# Altium PCB JTAGconv.PcbDoc
Units mm, origin at the board's own origin, x right, y up, seen from the top; angles counter-clockwise.
Board outline 25.4 x 30.48 mm, 2 copper layers (Component Side, Bottom Layer), stack 0.325 mm thick; 22 components, 21 nets, 96 pads, 23 vias.
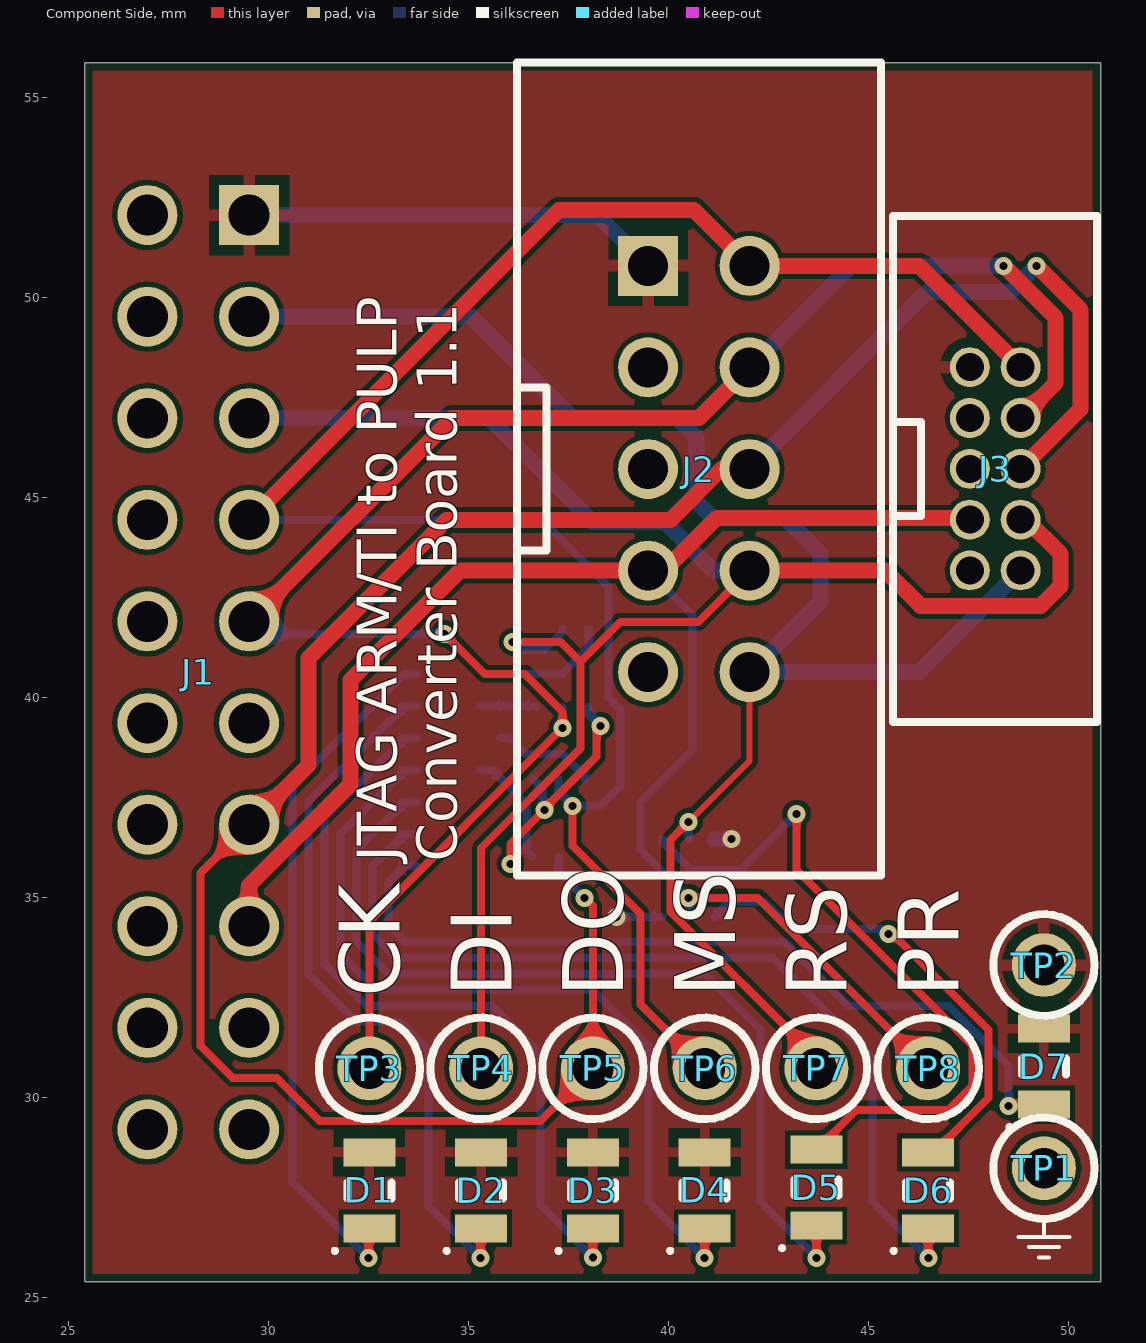
[diagram p0: Component Side view]
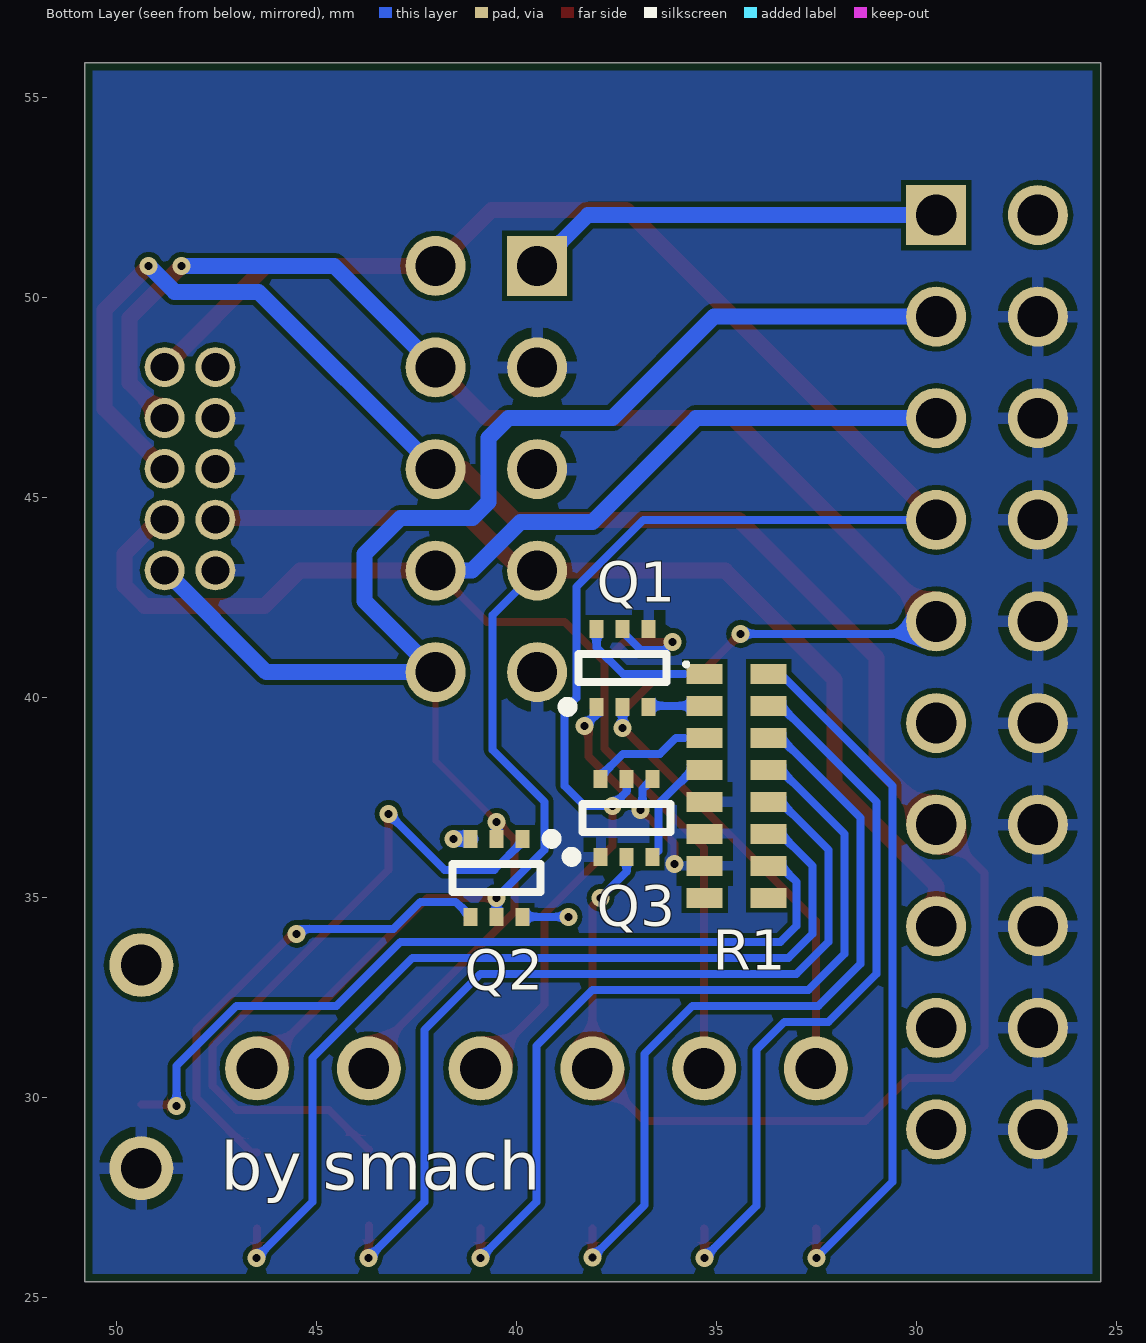
[diagram p1: Bottom Layer view, seen from below]
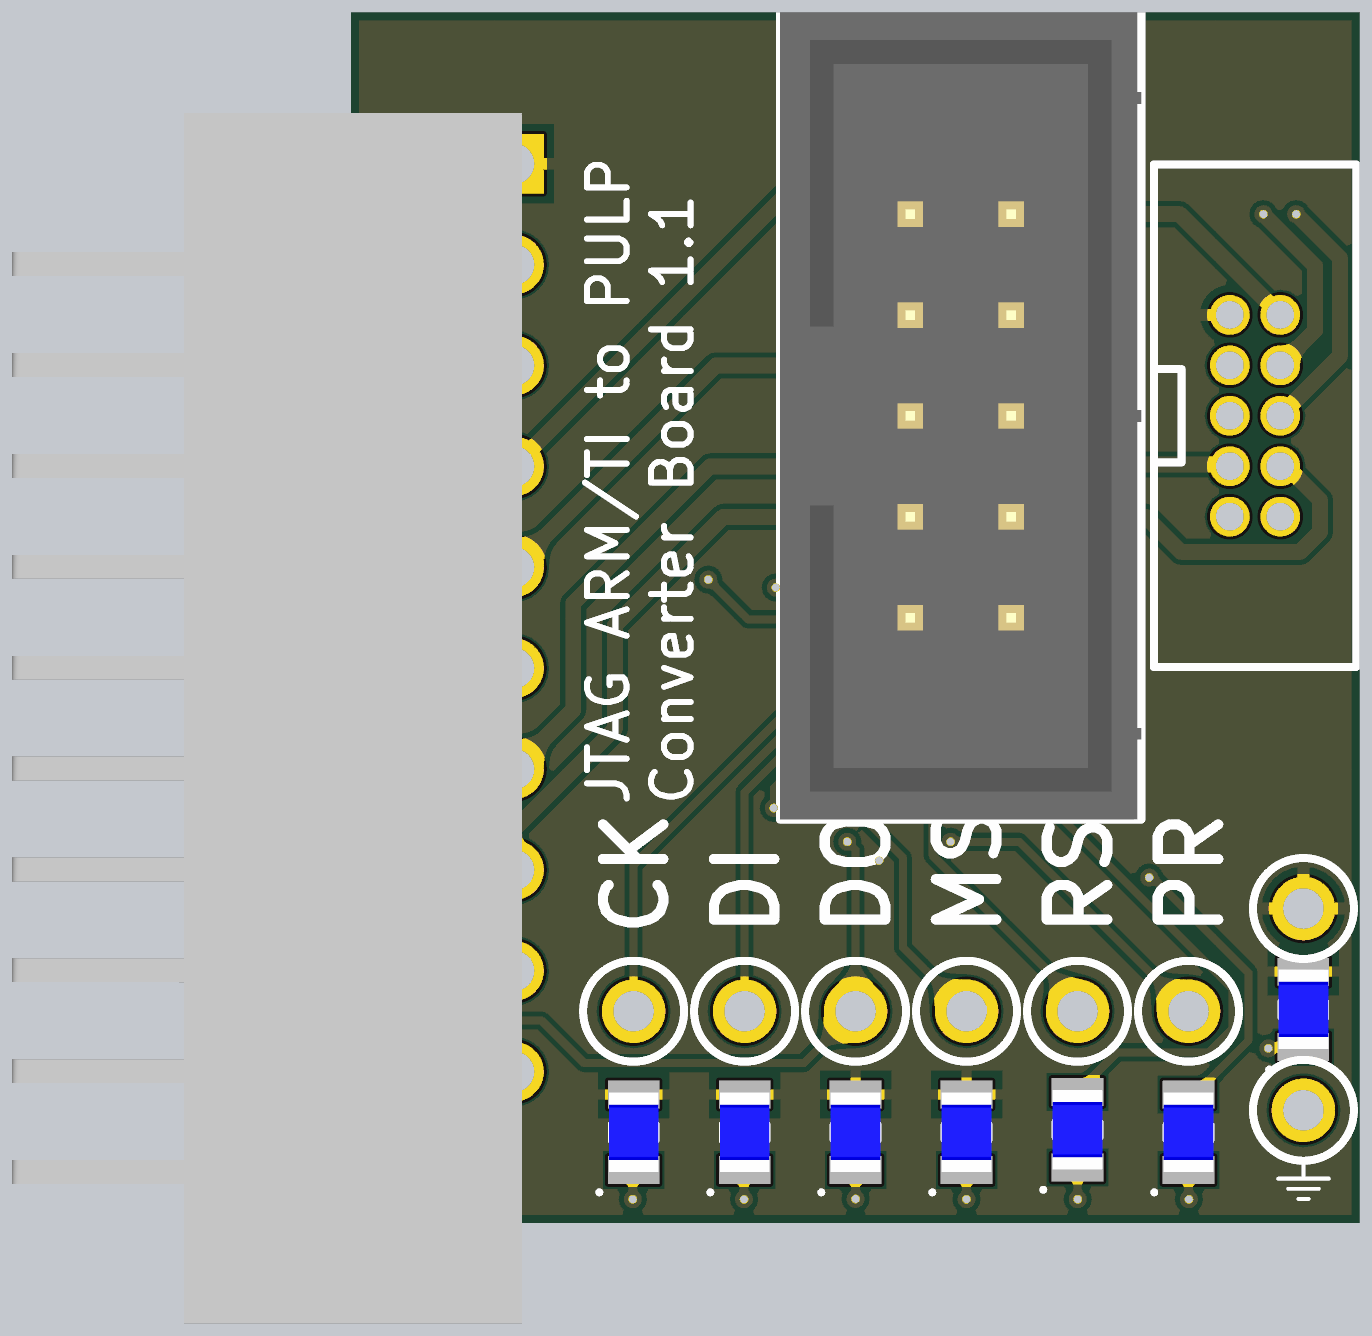
[diagram p2: 3D render of the assembled board from above, using the file's embedded part models]

## Layer stack, top to bottom
Top Solder: solder mask 0.0102, Solder Resist, Dk 3.5
Component Side: signal copper 0.0356
Dielectric 1: core 0.254, FR-4, Dk 4.2
Bottom Layer: signal copper 0.0356
Solder Side: solder mask 0.0102, Solder Resist, Dk 3.5

## Board outline
25.4,25.4 50.8,25.4 50.8,55.88 25.4,55.88

## Design rules (kind name [scope] priority, off if disabled: settings)
AcuteAngle [All] p1: minimum=6.00000000000000E+0001 checktracksonly=TRUE
BoardOutlineClearance [All] p1: gap=0.2 ignorepadtopadclearanceinfootprint=FALSE
Clearance Clearance_bga [TouchesRoom('VSOCBKP_BGA') or TouchesRoom('VCLUST_BGA')                  or TouchesRoom('uC_BGA')] p1: gap=0.075 ignorepadtopadclearanceinfootprint=FALSE except(0: Arc-Hole Track-Hole SMDPad-Hole THPad-Hole Via-Hole Fill-Hole Poly-Hole Region-Hole Text-Hole)
Clearance Clearance_pulp [InComponent('U2')] p2: gap=0.1 ignorepadtopadclearanceinfootprint=FALSE except(0: Arc-Hole Track-Hole SMDPad-Hole THPad-Hole Via-Hole Fill-Hole Poly-Hole Region-Hole Text-Hole)
Clearance Clearance_PULPLOGO [IsRegion & HasFootprint('AUX_PULPLOGO_4L')] p3: gap=0 ignorepadtopadclearanceinfootprint=TRUE
Clearance [All] p4: gap=0.125 ignorepadtopadclearanceinfootprint=FALSE
ComponentClearance ComponentClearance_moreweirdtphole [InComponent('TP27') vs InComponent('U2')] p1: gap=0 collisioncheckmode=3 verticalgap=0 showdistances=FALSE
ComponentClearance ComponentClearance_weird_tp_holes [InComponent('TP25') vs InComponent('TP26')] p2: gap=0 collisioncheckmode=3 verticalgap=0 showdistances=FALSE
ComponentClearance ComponentClearance_TPunderlatch [InComponent('U2') vs InComponent('TP23')] p3: gap=0 collisioncheckmode=3 verticalgap=0 showdistances=FALSE
ComponentClearance ComponentClearance_Hole [InComponentClass('Holes, Screws etc.')] p4: gap=0 collisioncheckmode=3 verticalgap=0 showdistances=TRUE
ComponentClearance ComponentClearance_NT [InComponentClass('NetTie')] p5: gap=0 collisioncheckmode=3 verticalgap=0 showdistances=TRUE
ComponentClearance [All] p6: gap=0.25 collisioncheckmode=3 verticalgap=0.25 showdistances=TRUE
DiffPairsRouting [All] p1: maxlimit=0.381 minlimit=0.2 mostfreqgap=0.3 toplayer_minwidth=0.2 toplayer_maxwidth=0.381 toplayer_prefwidth=0.3 bottomlayer_minwidth=0.2 bottomlayer_maxwidth=0.381 bottomlayer_prefwidth=0.3 maxuncoupledlength=12.7
FabricationTestpoint [All] p1: side=3 testpointundercomponent=TRUE minsize=0.5 maxsize=2.54 preferedsize=1.524 minholesize=0 maxholesize=1.016 preferedholesize=0.813 testpointgrid=0.025 allowsidetop=TRUE allowsidebottom=TRUE usegrid=TRUE gridtolerance=0
FanoutControl Fanout_BGA_1 [InComponent('U1')] p1: bgadir=Out bgaviamode=Centered fanoutstyle=BGA fanoutdirection=Alternating viagrid=0.025 // Fanout_BGA (Default Rule)
FanoutControl Fanout_BGA [IsBGA] p2: bgadir=Out bgaviamode=Centered fanoutstyle=Auto fanoutdirection=Alternating viagrid=0.025 // Fanout_BGA (Default Rule)
FanoutControl Fanout_LCC [IsLCC] p3: bgadir=Out bgaviamode=Centered fanoutstyle=Auto fanoutdirection=Alternating viagrid=0.025 // Fanout_LCC (Default Rule)
FanoutControl Fanout_SOIC [IsSOIC] p4: bgadir=Out bgaviamode=Centered fanoutstyle=Auto fanoutdirection=Alternating viagrid=0.025 // Fanout_SOIC (Default Rule)
FanoutControl Fanout_Small [(CompPinCount < 5)] p5: bgadir=Out bgaviamode=Centered fanoutstyle=Auto fanoutdirection=OutThenIn viagrid=0.025 // Fanout_Small (Default Rule)
FanoutControl Fanout_Default [All] p6: bgadir=Out bgaviamode=Centered fanoutstyle=Auto fanoutdirection=Alternating viagrid=0.025 // Fanout_Default (Default Rule)
Height [All] p1: minheight=0 maxheight=50 prefheight=12.7
HoleSize [All] p1: absolutevalues=TRUE maxlimit=5 minlimit=0.15 maxpercent=80.000 minpercent=20.000
HoleToHoleClearance [All] p1: gap=0.25 allowstackedmicrovias=FALSE
MinimumAnnularRing MinimumAnnularRing_Vias_bga [Isvia and TouchesRoom('uC_BGA')] p1: minimumring=0.075
MinimumAnnularRing MinimumAnnularRing_Vias [Isvia] p2: minimumring=0.124
MinimumAnnularRing [All] p3: minimumring=0.15
MinimumSolderMaskSliver MinimumSolderMaskSliver_1 [InComponent('U2') and IsPad and InNet('GND')] p1: minsoldermaskwidth=0
MinimumSolderMaskSliver [All] p2: minsoldermaskwidth=0.1
PlaneClearance "Mounting Holes" [InPadClass('ExtendedClearance')] p1: clearance=2.1
PlaneClearance [All] p2: clearance=0.2
PlaneConnect ViaInPlane [IsVia] p1: planeconnectstyle=Direct reliefexpansion=0.508 reliefentries=4 reliefconductorwidth=0.254 reliefairgap=0.254
PlaneConnect [All] p2: planeconnectstyle=Relief reliefexpansion=0.25 reliefentries=4 reliefconductorwidth=0.3 reliefairgap=0.2
PolygonConnect ViaInPolygon [IsVia] p1: connectstyle=Direct reliefconductorwidth=0.254 reliefentries=4 polygonreliefangle="90 Angle" airgapwidth=0.254
PolygonConnect PolygonConnect_throughhole [IsPadHoleValid And Not IsVia] p2: connectstyle=Relief reliefconductorwidth=0.3 reliefentries=4 polygonreliefangle="90 Angle" airgapwidth=0.25
PolygonConnect [All] p3: connectstyle=Relief reliefconductorwidth=0.25 reliefentries=4 polygonreliefangle="90 Angle" airgapwidth=0.25
RoutingVias RoutingVias_BGA [TouchesRoom('uC_BGA')] p1: holewidth=0.2 width=0.35 viastyle="Through Hole" minholewidth=0.2 minwidth=0.35 maxholewidth=0.3 maxwidth=0.6 viatemplateguid#1={47C5AC95-9C33-4135-A81B-A9012375E807} viatemplatename#1=v40h15x30m0mx0
RoutingVias [All] p2: holewidth=0.2 width=0.45 viastyle="Through Hole" minholewidth=0.2 minwidth=0.45 maxholewidth=0.3 maxwidth=0.6
ShortCircuit ShortCircuit_variant_footprint [IsPad and not InAnyNet vs IsPad and not InAnyNet] p1: allowed=TRUE
ShortCircuit [All] p2: allowed=FALSE
SilkToSilkClearance "SilkText Exception" [OnSilkscreen  And (IsText And Not IsDesignator) vs OnSilkscreen  And ((IsText And Not IsDesignator) or IsTrack)] p1: silktosilkclearance=0
SilkToSilkClearance [All] p2: silktosilkclearance=0.1
SilkToSolderMaskClearance [IsPad] p1: minsilkscreentomaskgap=0.1 clearancetoexposedcopper=TRUE
SolderMaskExpansion [All] p1: expansion=0.075
Width Width_bga [TouchesRoom('VCLUST_BGA') or TouchesRoom('VSOCBKP_BGA') OR TouchesRoom('uC_BGA')] p1: maxlimit=0.6 minlimit=0.1 preferedwidth=0.125 minimp=50.000000 maximp=50.000000 favimp=50.000000
Width Width_PWR [InNetClass('POWER')] p2: maxlimit=1 minlimit=0.15 preferedwidth=0.2 minimp=50.000000 maximp=50.000000 favimp=50.000000
Width [All] p3: maxlimit=0.6 minlimit=0.15 preferedwidth=0.15 minimp=50.000000 maximp=50.000000 favimp=50.000000
13 further rules are at their usual default settings.

## Components (designator, comment, footprint, x,y, rotation, side; value= is the part's Value field where it differs from the comment)
D1 "LED Red" DIOC2112X08L 32.52,27.686 r270 top
D2 "LED Red" DIOC2112X08L 35.314,27.686 r270 top
D3 "LED Red" DIOC2112X08L 38.108,27.686 r270 top
D4 "LED Red" DIOC2112X08L 40.902,27.686 r270 top
D5 "LED Yellow" DIOC2112X08L 43.696,27.752 r270 top
D6 "LED Yellow" DIOC2112X08L 46.49,27.686 r270 top
D7 "LED Orange" DIOC2112X08L 49.383,30.78 r270 top
J1 "Socket 10x2" CONN_SOCKET_10x2_RA 29.51,52.07 r270 top locked
J2 "Header 5x2" CONN_HDR_5x2_SHRD 39.485,50.8 r270 top
J3 "Header 5x2" CONN_HDR_5x2_50mil_SHRD 47.53,48.265 r270 top
Q1 "NX3008NBKS,115" NXP-SOT363_L 37.35,40.75 r90 bottom
Q2 "NX3008PBKS,115" NXP-SOT363_L 40.5,35.5 r270 bottom
Q3 "NX3008NBKS,115" NXP-SOT363_L 37.25,37 r90 bottom
R1 "10R" CAC-80P639X159-16L 34.5,37.8 r180 bottom
TP1 "TESTPOINT Black" KEYSTONE-5001 49.383,28.24 r0 top
TP2 "TESTPOINT Red" KEYSTONE-5000 49.383,33.32 r0 top
TP3 "TESTPOINT White" KEYSTONE-5002 32.52,30.734 r0 top
TP4 "TESTPOINT Green" KEYSTONE-5116 35.314,30.734 r0 top
TP5 "TESTPOINT Yellow" KEYSTONE-5004 38.108,30.734 r0 top
TP6 "TESTPOINT Orange" KEYSTONE-5003 40.902,30.734 r0 top
TP7 "TESTPOINT Purple" KEYSTONE-5119 43.696,30.734 r0 top
TP8 "TESTPOINT Grey" KEYSTONE-5118 46.49,30.734 r0 top

## Footprints (in the part's own frame and the unit in brackets; to place one, negate y for a bottom-side part, rotate by r counter-clockwise, add the part's x,y. Pads: shape width x height; smd on the part's side, far side on the other; paste and mask are expansions set on the pad)
CAC-80P639X159-16L [mm] "Chip Array, Concave, 16-Leads, Pitch 0.80mm,  Body 6.40x1.60mm,  IPC High Density"
  rect 0.9x0.5 smd: 1(-0.8,2.8) 2(-0.8,2) 3(-0.8,1.2) 4(-0.8,0.4) 5(-0.8,-0.4) 6(-0.8,-1.2) 7(-0.8,-2) 8(-0.8,-2.8) 9(0.8,-2.8) 10(0.8,-2) 11(0.8,-1.2) 12(0.8,-0.4) 13(0.8,0.4) 14(0.8,1.2) 15(0.8,2) 16(0.8,2.8)
  silkscreen extent -1.31,2.99 -1.21,3.09, body extent -0.95,-3.3 0.95,3.3, height 0.7
CONN_HDR_5x2_50mil_SHRD [mm] "Male Header 5x2, Shrouded, 10-Pin, Pitch 1.27mm"
  round 1 hole 0.7: 1(0,0) 2(0,1.27) 3(1.27,0) 4(1.27,1.27) 5(2.54,0) 6(2.54,1.27) 7(3.81,0) 8(3.81,1.27) 9(5.08,0) 10(5.08,1.27)
  silkscreen extent -3.79,-1.91 8.86,3.18, body extent -3.79,-1.91 8.86,3.19, height 5.4
CONN_HDR_5x2_SHRD [mm] "Pin Header Male, 5x2, Pitch 2.54mm, 10-Pin, Shrouded"
  rect 1.5x1.5 hole 1: 1(0,0)
  round 1.5 hole 1: 2(0,2.54) 3(2.54,0) 4(2.54,2.54) 5(5.08,0) 6(5.08,2.54) 7(7.62,0) 8(7.62,2.54) 9(10.16,0) 10(10.16,2.54)
  silkscreen extent -5.08,-3.28 15.24,5.82, body extent -5.08,-3.28 15.24,5.82, height 9.01
CONN_SOCKET_10x2_RA [mm] "Female Socket, 10x2, Pitch 2.54mm, 20-Pin, Right-Angle"
  rect 1.5x1.5 hole 1.02: 1(0,0)
  round 1.5 hole 1.02: 2(0,-2.54) 3(2.54,0) 4(2.54,-2.54) 5(5.08,0) 6(5.08,-2.54) 7(7.62,0) 8(7.62,-2.54) 9(10.16,0) 10(10.16,-2.54) 11(12.7,0) 12(12.7,-2.54) 13(15.24,0) 14(15.24,-2.54) 15(17.78,0) 16(17.78,-2.54) 17(20.32,0) 18(20.32,-2.54) 19(22.86,0) 20(22.86,-2.54)
  body extent -3.81,-12.65 26.67,0.19, height 7.01
DIOC2112X08L [mm] "Chip Diode, 2-Leads, Body 2.10x1.25mm, IPC High Density"
  rect 0.7x1.3 smd: 1(-0.95,0) 2(0.95,0)
  silkscreen extent -0.2,-0.91 1.56,0.55, body extent -1,-0.62 1,0.63, height 0.8
KEYSTONE-5000 [mm] "Keystone Compact Through-Hole Test Points"
  round 1.6 hole 1.02: 1(0,0)
  silkscreen extent -1.27,-1.27 1.27,1.27, body extent -1.27,-1.27 1.27,1.27, height 4.57
KEYSTONE-5001 [mm] "Keystone Compact Through-Hole Test Points"
  round 1.6 hole 1.02: 1(0,0)
  silkscreen extent -1.27,-1.27 1.27,1.27, body extent -1.27,-1.27 1.27,1.27, height 4.57
KEYSTONE-5002 [mm] "Keystone Compact Through-Hole Test Points"
  round 1.6 hole 1.02: 1(0,0)
  silkscreen extent -1.27,-1.27 1.27,1.27, body extent -1.27,-1.27 1.27,1.27, height 4.57
KEYSTONE-5003 [mm] "Keystone Compact Through-Hole Test Points"
  round 1.6 hole 1.02: 1(0,0)
  silkscreen extent -1.27,-1.27 1.27,1.27, body extent -1.27,-1.27 1.27,1.27, height 4.57
KEYSTONE-5004 [mm] "Keystone Compact Through-Hole Test Points"
  round 1.6 hole 1.02: 1(0,0)
  silkscreen extent -1.27,-1.27 1.27,1.27, body extent -1.27,-1.27 1.27,1.27, height 4.57
KEYSTONE-5116 [mm] "Keystone Compact Through-Hole Test Points"
  round 1.6 hole 1.02: 1(0,0)
  silkscreen extent -1.27,-1.27 1.27,1.27, body extent -1.27,-1.27 1.27,1.27, height 4.57
KEYSTONE-5118 [mm] "Keystone Compact Through-Hole Test Points"
  round 1.6 hole 1.02: 1(0,0)
  silkscreen extent -1.27,-1.27 1.27,1.27, body extent -1.27,-1.27 1.27,1.27, height 4.57
KEYSTONE-5119 [mm] "Keystone Compact Through-Hole Test Points"
  round 1.6 hole 1.02: 1(0,0)
  silkscreen extent -1.27,-1.27 1.27,1.27, body extent -1.27,-1.27 1.27,1.27, height 4.57
NXP-SOT363_L [mm] "SOT23, 6-Leads, Body 2.2x1.35mm, Pitch 0.65mm, IPC High Density"
  rect 0.45x0.35 smd: 1(-0.975,0.65) 2(-0.975,0) 3(-0.975,-0.65) 4(0.975,-0.65) 5(0.975,0) 6(0.975,0.65)
  silkscreen extent -1.1,-1.1 0.35,1.5, body extent -0.67,-1.1 0.67,1.1, height 1.1

## Part data
D1 D2 D3 D4: library part ROHM-LED-RED-SML-211UTT86, "Red LED, 0805 SMD, 2mA, 1.8V", Case/Package=0805, Case Code (Metric)=2012, Colour=Red, Forward Current=2mA, Forward Voltage=1.8V, Lens Colour=Colorless, Manufacturer=Rohm, Manufacturer Part Number=SML-211UTT86, Max Operating Temperature=85°C, Min Operating Temperature=-30°C, Package Quantity=3000, Supplier Part Number 1=511-1292-2-ND, Supplier Part Number 10=C1S625900634159, Supplier Part Number 11=6473904, Supplier Part Number 12=5988308, Supplier Part Number 13=70522030, Supplier Part Number 19=1685056, Case Code (Imperial)=0805, ComponentLink1Description=https://datasheet.ciiva.com/11774/0900766b80df3a3e-11774129.pdf, ComponentLink1URL=https://datasheet.ciiva.com/11774/0900766b80df3a3e-11774129.pdf, ComponentLink2Description=https://datasheet.ciiva.com/2115/sml-21-2115075.pdf, ComponentLink2URL=https://datasheet.ciiva.com/2115/sml-21-2115075.pdf, ComponentLink3Description=https://datasheet.ciiva.com/16293/sml-211ytt86-16293295.pdf, ComponentLink3URL=https://datasheet.ciiva.com/16293/sml-211ytt86-16293295.pdf, ComponentLink4Description=https://datasheet.ciiva.com/2115/sml-21-2115073.pdf, ComponentLink4URL=https://datasheet.ciiva.com/2115/sml-21-2115073.pdf, ComponentLink5Description=https://datasheet.ciiva.com/2115/sml-21-2115074.pdf, ComponentLink5URL=https://datasheet.ciiva.com/2115/sml-21-2115074.pdf, ComponentLink6Description=https://datasheet.ciiva.com/8028/1694508-8028242.pdf, ComponentLink6URL=https://datasheet.ciiva.com/8028/1694508-8028242.pdf, Dominant Wavelength=620nm, Height=0.9mm, Illumination Colour=Red, Lead Free="Lead Free", Length=2mm, Lens Style=Diffused,Colorless, Lens Transparency=Clear, Luminous Intensity=2.5mcd, Mount="Surface Mount", Number of LEDs=1, Number of Pins=2, Packaging="Tape and Reel", Pricing 1="3000=0.1073, 6000=0.0975, 15000=0.091, 30000=0.0878, 75000=0.0845 (USD)", Pricing 2="1=0.49, 10=0.35, 25=0.286, 100=0.2288, 250=0.193, 500=0.1645, 1000=0.1287 (USD)", Pricing 3="5=0.328, 25=0.24, 100=0.144, 250=0.142, 500=0.138 (EUR)", Pricing 4="1=0.49, 10=0.35, 25=0.286, 100=0.2288, 250=0.193, 500=0.1645, 1000=0.1287 (USD)", Pricing 5="70=0.3839, 100=0.2371, 500=0.2101, 1000=0.1859 (USD)", Pricing 6="10=57.8, 50=41, 100=35.7, 500=19.5, 1000=15.1, 3000=14.7, 10=0.287, 50=0.285, 100=0.176, 500=0.156, 1000=0.138, 3000=0.134, 10=2.59, 100=1.4, 1000=1.1, 3000=1.07 (JPY)", Pricing 7="3000=0.104 (USD)", Pricing 8="1=0.38, 10=0.288, 50=0.288, 100=0.156, 1000=0.117, 10000=0.095 (USD)", Pricing 9="3000=0.2086, 6000=0.1622, 12000=0.1327, 18000=0.1123, 30000=0.1043 (EUR)", Pricing 10="50=89.3, 500=84.8, 1000=78.8, 50=0.834, 500=0.792, 1000=0.736, 50=6.65, 500=6.31, 1000=5.86 (JPY)", Pricing 11="3000=0.0898, 9000=0.0869 (USD)", Pricing 12="1=0.1, 400=0.0975 (USD)", Pricing 13="1=0.67, 100=0.59, 250=0.53, 500=0.49 (USD)", Pricing 14="3000=0.1029, 6000=0.0964, 12000=0.0908, 18000=0.0858, 30000=0.0834 (USD)", Pricing 15="3000=0.1051, 6000=0.0956, 12000=0.0924, 18000=0.0892, 30000=0.088 (USD)", Pricing 18="3000=0.104, 6000=0.0956, 9000=0.0936 (USD)", Pricing 19="1=0.688, 10=0.319, 100=0.238, 250=0.209, 500=0.188, 2000=0.167, 4000=0.15, 20000=0.131 (EUR)", Pricing 22="3000=0.072, 10000=0.072 (USD)", Pricing 23="1=0.43, 100=0.189, 2000=0.0918, 4000=0.0826, 20000=0.0744 (GBP)", Radiation Hardening=No, REACH SVHC="No SVHC", Stock 1=93000, Stock 2=94293, Stock 3=4280, Stock 4=94293, Stock 5=3373, Stock 6=3373, Stock 7=3000, Stock 8=8950, Stock 9=0, Stock 10=3000, Stock 11=0, Stock 12=0, Stock 13=5, Stock 14=0, Stock 15=0, Stock 16=2800, Stock 17=2840, Stock 18=0, Stock 19=0, Stock 20=102, Stock 21=0, Stock 22=6000, Stock 23=15873, Supplier 1=Digikey, Supplier 2=Digikey, Supplier 3="RS Components", Supplier 4=Digikey, Supplier 5=Verical, Supplier 6="Chip One Stop Japan", Supplier 7="Future Electronics", Supplier 8=Mouser, Supplier 9="Avnet Europe", Supplier 10="Chip One Stop Global", Supplier 11="Future Electronics", Supplier 12="Future Electronics", Supplier 13="Allied Electronics", Supplier 14=Avnet, Supplier 15="Avnet Asia", Supplier 16="LTL Group", Supplier 17=Quest, Supplier 18="Future Electronics", Supplier 19=Farnell, Supplier 20="element14 APAC", Supplier 21=Newark, Supplier 22=Epart123, Supplier 23=Farnell, Supplier Part Number 2=511-1292-6-ND, Supplier Part Number 3=7007907, Supplier Part Number 4=511-1292-1-ND, Supplier Part Number 5=SML-211UTT86, Supplier Part Number 6=C1S625900634159, Supplier Part Number 7=7057434, Supplier Part Number 8=755-SML-211UTT86, Supplier Part Number 9=SML-211UTT86, Supplier Part Number 14=SML-211UTT86, Supplier Part Number 15=SML-211UTT86, Supplier Part Number 16=SML-211UTT86, Supplier Part Number 17=SML-211UTT86, Supplier Part Number 18=SML-211UTT86, Supplier Part Number 20=1685056, Supplier Part Number 21=40P3314, Supplier Part Number 22=SML-211UTT86K, Supplier Part Number 23=1685056RL, Test Current=2mA, Viewing Angle=140°, Wavelength=630nm, Width=1.25mm
D5 D6: library part ROHM-LED-YELLOW-SML-211YTT86, "Yellow LED, 0805 SMD, 2mA, 1.8V", Case/Package=0805, Case Code (Metric)=2012, Colour=Red, Forward Current=2mA, Forward Voltage=1.8V, Lens Colour=Colorless, Manufacturer=Rohm, Manufacturer Part Number=SML-211UTT86, Max Operating Temperature=85°C, Min Operating Temperature=-30°C, Package Quantity=3000, Supplier Part Number 1=511-1293-2-ND, Supplier Part Number 10=SML-211YTT86, Supplier Part Number 12=8894297, Supplier Part Number 13=6809040, Supplier Part Number 15=C1S625900634186, Supplier Part Number 17=755-SML-211YTT86, Supplier Part Number 18=511-1293-1-ND, Case Code (Imperial)=0805, ComponentLink1Description=https://datasheet.ciiva.com/11774/0900766b80df3a3e-11774129.pdf, ComponentLink1URL=https://datasheet.ciiva.com/11774/0900766b80df3a3e-11774129.pdf, ComponentLink2Description=https://datasheet.ciiva.com/2115/sml-21-2115075.pdf, ComponentLink2URL=https://datasheet.ciiva.com/2115/sml-21-2115075.pdf, ComponentLink3Description=https://datasheet.ciiva.com/16293/sml-211ytt86-16293295.pdf, ComponentLink3URL=https://datasheet.ciiva.com/16293/sml-211ytt86-16293295.pdf, ComponentLink4Description=https://datasheet.ciiva.com/2115/sml-21-2115073.pdf, ComponentLink4URL=https://datasheet.ciiva.com/2115/sml-21-2115073.pdf, ComponentLink5Description=https://datasheet.ciiva.com/2115/sml-21-2115074.pdf, ComponentLink5URL=https://datasheet.ciiva.com/2115/sml-21-2115074.pdf, ComponentLink6Description=https://datasheet.ciiva.com/8028/1694508-8028242.pdf, ComponentLink6URL=https://datasheet.ciiva.com/8028/1694508-8028242.pdf, ComponentLink7Description=https://datasheet.ciiva.com/11774/0900766b80df3a3e-11774886.pdf, ComponentLink7URL=https://datasheet.ciiva.com/11774/0900766b80df3a3e-11774886.pdf, ComponentLink8Description=https://datasheet.ciiva.com/16392/sml-211ytt86-16392987.pdf, ComponentLink8URL=https://datasheet.ciiva.com/16392/sml-211ytt86-16392987.pdf, ComponentLink9Description=https://datasheet.ciiva.com/2111/sml-21-2111285.pdf, ComponentLink9URL=https://datasheet.ciiva.com/2111/sml-21-2111285.pdf, ComponentLink10Description=https://datasheet.ciiva.com/2111/sml-21-2111283.pdf, ComponentLink10URL=https://datasheet.ciiva.com/2111/sml-21-2111283.pdf, ComponentLink11Description=https://datasheet.ciiva.com/2111/sml-21-2111284.pdf, ComponentLink11URL=https://datasheet.ciiva.com/2111/sml-21-2111284.pdf, ComponentLink12Description=https://datasheet.ciiva.com/8028/90860-8028248.pdf, ComponentLink12URL=https://datasheet.ciiva.com/8028/90860-8028248.pdf, ComponentLink13Description=https://datasheet.ciiva.com/8028/90860-8028245.pdf, ComponentLink13URL=https://datasheet.ciiva.com/8028/90860-8028245.pdf, Dominant Wavelength=620nm, Height=0.9mm, Illumination Colour=Red, Lead Free="Lead Free", Length=2mm, Lens Style=Diffused,Colorless, Lens Transparency=Clear, Luminous Intensity=2.5mcd, Mount="Surface Mount", Number of LEDs=1, Number of Pins=2, Packaging="Tape and Reel", Pricing 1="3000=0.1073, 6000=0.0975, 15000=0.091, 30000=0.0878, 75000=0.0845 (USD)", Pricing 2="1=0.49, 10=0.35, 25=0.286, 100=0.2288, 250=0.193, 500=0.1645, 1000=0.1287 (USD)", Pricing 3="900=0.0963, 3000=0.0922, 9000=0.0904 (GBP)", Pricing 7="1=1.07, 10=0.502, 100=0.369, 250=0.327, 500=0.291, 900=0.261, 3000=0.232, 9000=0.206 (EUR)", Pricing 8="3000=0.104, 6000=0.0956, 9000=0.0936 (USD)", Pricing 9="1=0.276, 19=0.207, 49=0.1725, 291=0.138, 1450=0.1035 (USD)", Pricing 10="2238=2238 (USD)", Pricing 11="3000=0.1029, 6000=0.0964, 12000=0.0908, 18000=0.0858, 30000=0.0834 (USD)", Pricing 12="1=0.1, 400=0.0975 (USD)", Pricing 13="3000=0.0898, 9000=0.0869 (USD)", Pricing 14="3000=0.2086, 6000=0.1622, 12000=0.1327, 18000=0.1123, 30000=0.1043 (EUR)", Pricing 15="50=89.3, 500=84.8, 1000=78.8, 50=0.834, 500=0.792, 1000=0.736, 50=6.65, 500=6.31, 1000=5.86 (JPY)", Pricing 16="10=33.1, 50=32.2, 100=25.8, 500=18.5, 1000=15.1, 3000=14.7, 10=0.272, 50=0.27, 100=0.176, 500=0.155, 1000=0.138, 3000=0.134, 10=2.46, 50=2.26, 100=1.39, 500=1.29, 1000=1.1, 3000=1.07 (JPY)", Pricing 17="1=0.38, 10=0.288, 50=0.288, 100=0.156, 1000=0.117, 10000=0.095 (USD)", Pricing 18="1=0.49, 10=0.35, 25=0.286, 100=0.2288, 250=0.193, 500=0.1645, 1000=0.1287 (USD)", Pricing 19="74=0.3622, 100=0.2361, 500=0.208, 1000=0.1851 (USD)", Pricing 20="5=0.318, 25=0.232, 100=0.14, 250=0.138, 500=0.134 (EUR)", Radiation Hardening=No, REACH SVHC="No SVHC", Stock 1=12000, Stock 2=13553, Stock 3=12289, Stock 4=60, Stock 5=0, Stock 6=0, Stock 7=0, Stock 8=6000, Stock 9=2989, Stock 10=0, Stock 11=0, Stock 12=0, Stock 13=0, Stock 14=0, Stock 15=3000, Stock 16=11890, Stock 17=2680, Stock 18=13553, Stock 19=11890, Stock 20=1739, Supplier 1=Digikey, Supplier 2=Digikey, Supplier 3=Farnell, Supplier 4="element14 APAC", Supplier 5=Newark, Supplier 6="Avnet Europe", Supplier 7=Farnell, Supplier 8="Future Electronics", Supplier 9=Quest, Supplier 10="LTL Group", Supplier 11=Avnet, Supplier 12="Future Electronics", Supplier 13="Future Electronics", Supplier 14="Avnet Europe", Supplier 15="Chip One Stop Global", Supplier 16="Chip One Stop Japan", Supplier 17=Mouser, Supplier 18=Digikey, Supplier 19=Verical, Supplier 20="RS Components", Supplier Part Number 2=511-1293-6-ND, Supplier Part Number 3=1685057RL, Supplier Part Number 4=1685057, Supplier Part Number 5=40P3315, Supplier Part Number 6=SML211YTT86K, Supplier Part Number 7=1685057, Supplier Part Number 8=SML-211YTT86, Supplier Part Number 9=SML-211YTT86, Supplier Part Number 11=SML-211YTT86, Supplier Part Number 14=SML-211YTT86, Supplier Part Number 16=C1S625900634186, Supplier Part Number 19=SML-211YTT86, Supplier Part Number 20=7007900, Test Current=2mA, Viewing Angle=140°, Wavelength=630nm, Width=1.25mm
D7: library part ROHM-LED-ORANGE-SML-211DTT86, "Orange LED, 0805 SMD, 2mA, 1.8V", Case/Package=0805, Case Code (Metric)=2012, Colour=Red, Forward Current=2mA, Forward Voltage=1.8V, Lens Colour=Colorless, Manufacturer=Rohm, Manufacturer Part Number=SML-211UTT86, Max Operating Temperature=85°C, Min Operating Temperature=-30°C, Package Quantity=3000, Supplier Part Number 1=SML-211DTT86K, Supplier Part Number 10=7007897, Supplier Part Number 11=511-1291-6-ND, Supplier Part Number 12=SML-211DTT86, Supplier Part Number 13=C1S625900507174, Supplier Part Number 14=755-SML-211DTT86, Supplier Part Number 15=6940829, Supplier Part Number 17=7062953, Case Code (Imperial)=0805, ComponentLink1Description=https://datasheet.ciiva.com/11774/0900766b80df3a3e-11774129.pdf, ComponentLink1URL=https://datasheet.ciiva.com/11774/0900766b80df3a3e-11774129.pdf, ComponentLink2Description=https://datasheet.ciiva.com/2115/sml-21-2115075.pdf, ComponentLink2URL=https://datasheet.ciiva.com/2115/sml-21-2115075.pdf, ComponentLink3Description=https://datasheet.ciiva.com/16293/sml-211ytt86-16293295.pdf, ComponentLink3URL=https://datasheet.ciiva.com/16293/sml-211ytt86-16293295.pdf, ComponentLink4Description=https://datasheet.ciiva.com/2115/sml-21-2115073.pdf, ComponentLink4URL=https://datasheet.ciiva.com/2115/sml-21-2115073.pdf, ComponentLink5Description=https://datasheet.ciiva.com/2115/sml-21-2115074.pdf, ComponentLink5URL=https://datasheet.ciiva.com/2115/sml-21-2115074.pdf, ComponentLink6Description=https://datasheet.ciiva.com/8028/1694508-8028242.pdf, ComponentLink6URL=https://datasheet.ciiva.com/8028/1694508-8028242.pdf, ComponentLink7Description=https://datasheet.ciiva.com/11774/0900766b80df3a3e-11774886.pdf, ComponentLink7URL=https://datasheet.ciiva.com/11774/0900766b80df3a3e-11774886.pdf, ComponentLink8Description=https://datasheet.ciiva.com/16392/sml-211ytt86-16392987.pdf, ComponentLink8URL=https://datasheet.ciiva.com/16392/sml-211ytt86-16392987.pdf, ComponentLink9Description=https://datasheet.ciiva.com/2111/sml-21-2111285.pdf, ComponentLink9URL=https://datasheet.ciiva.com/2111/sml-21-2111285.pdf, ComponentLink10Description=https://datasheet.ciiva.com/2111/sml-21-2111283.pdf, ComponentLink10URL=https://datasheet.ciiva.com/2111/sml-21-2111283.pdf, ComponentLink11Description=https://datasheet.ciiva.com/2111/sml-21-2111284.pdf, ComponentLink11URL=https://datasheet.ciiva.com/2111/sml-21-2111284.pdf, ComponentLink12Description=https://datasheet.ciiva.com/8028/90860-8028248.pdf, ComponentLink12URL=https://datasheet.ciiva.com/8028/90860-8028248.pdf, ComponentLink13Description=https://datasheet.ciiva.com/8028/90860-8028245.pdf, ComponentLink13URL=https://datasheet.ciiva.com/8028/90860-8028245.pdf, ComponentLink14Description=https://datasheet.ciiva.com/8028/90860-8028240.pdf, ComponentLink14URL=https://datasheet.ciiva.com/8028/90860-8028240.pdf, ComponentLink15Description=https://datasheet.ciiva.com/8028/90860-8028237.pdf, ComponentLink15URL=https://datasheet.ciiva.com/8028/90860-8028237.pdf, ComponentLink16Description=https://datasheet.ciiva.com/16219/sml-211ytt86-16219080.pdf, ComponentLink16URL=https://datasheet.ciiva.com/16219/sml-211ytt86-16219080.pdf, ComponentLink17Description=https://datasheet.ciiva.com/11773/0900766b80df3a3e-11773627.pdf, ComponentLink17URL=https://datasheet.ciiva.com/11773/0900766b80df3a3e-11773627.pdf, ComponentLink18Description=https://datasheet.ciiva.com/2111/sml-21-2111286.pdf, ComponentLink18URL=https://datasheet.ciiva.com/2111/sml-21-2111286.pdf, ComponentLink19Description=https://datasheet.ciiva.com/2111/sml-21-2111287.pdf, ComponentLink19URL=https://datasheet.ciiva.com/2111/sml-21-2111287.pdf, ComponentLink20Description=https://datasheet.ciiva.com/2111/sml-21-2111288.pdf, ComponentLink20URL=https://datasheet.ciiva.com/2111/sml-21-2111288.pdf, Dominant Wavelength=620nm, Height=0.9mm, Illumination Colour=Red, Lead Free="Lead Free", Length=2mm, Lens Style=Diffused,Colorless, Lens Transparency=Clear, Luminous Intensity=2.5mcd, Mount="Surface Mount", Number of LEDs=1, Number of Pins=2, Packaging="Tape and Reel", Pricing 2="3000=0.1073, 6000=0.0975, 15000=0.091, 30000=0.0878, 75000=0.0845 (USD)", Pricing 3="3000=0.1029, 6000=0.0964, 12000=0.0908, 18000=0.0858, 30000=0.0834 (USD)", Pricing 4="1=0.42, 200=0.37, 500=0.33, 1000=0.31 (USD)", Pricing 6="1=0.391, 10=0.289, 100=0.248, 250=0.214, 500=0.184, 1000=0.143, 2500=0.127, 5000=0.107 (USD)", Pricing 7="1=0.38, 10=0.222, 100=0.163, 2000=0.0792, 4000=0.0713, 20000=0.0642 (GBP)", Pricing 8="3000=0.104, 6000=0.0956, 9000=0.0936 (USD)", Pricing 9="1=0.49, 10=0.35, 25=0.286, 100=0.2288, 250=0.193, 500=0.1645, 1000=0.1287 (USD)", Pricing 10="10=0.245, 50=0.196, 200=0.145, 500=0.122, 1000=0.113 (EUR)", Pricing 11="1=0.49, 10=0.35, 25=0.286, 100=0.2288, 250=0.193, 500=0.1645, 1000=0.1287 (USD)", Pricing 12="70=0.3793, 100=0.2342, 500=0.2063, 1000=0.1836 (USD)", Pricing 13="10=41.7, 50=34, 100=29.5, 500=25.3, 1000=23.1, 10=0.287, 50=0.285, 100=0.176, 500=0.156, 1000=0.138, 10=2.91, 50=2.38, 100=1.9, 500=1.36, 1000=1.1 (JPY)", Pricing 14="1=0.38, 10=0.288, 50=0.288, 100=0.156, 1000=0.117, 10000=0.095 (USD)", Pricing 15="1=0.1, 400=0.0975 (USD)", Pricing 17="3000=0.0898, 9000=0.0869 (USD)", Pricing 18="3000=0.1029 (USD)", Pricing 20="1=0.722, 10=0.333, 100=0.245, 250=0.213, 500=0.191, 2000=0.17, 4000=0.153, 20000=0.134 (EUR)", Radiation Hardening=No, REACH SVHC="No SVHC", Stock 1=0, Stock 2=33000, Stock 3=0, Stock 4=50, Stock 5=587, Stock 6=1089, Stock 7=6606, Stock 8=0, Stock 9=34587, Stock 10=1709, Stock 11=34587, Stock 12=2869, Stock 13=2869, Stock 14=0, Stock 15=0, Stock 16=0, Stock 17=0, Stock 18=0, Stock 19=2900, Stock 20=0, Stock 21=0, Supplier 1=Avnet, Supplier 2=Digikey, Supplier 3=Avnet, Supplier 4="Allied Electronics", Supplier 5=Quest, Supplier 6=Newark, Supplier 7=Farnell, Supplier 8="Future Electronics", Supplier 9=Digikey, Supplier 10="RS Components", Supplier 11=Digikey, Supplier 12=Verical, Supplier 13="Chip One Stop Japan", Supplier 14=Mouser, Supplier 15="Future Electronics", Supplier 16="Avnet Europe", Supplier 17="Future Electronics", Supplier 18="Avnet Asia", Supplier 19=SPEC, Supplier 20=Farnell, Supplier 21="element14 APAC", Supplier Part Number 2=511-1291-2-ND, Supplier Part Number 3=SML-211DTT86, Supplier Part Number 4=70522027, Supplier Part Number 5=SML-211DTT86, Supplier Part Number 6=40P3313, Supplier Part Number 7=1685055RL, Supplier Part Number 8=SML-211DTT86, Supplier Part Number 9=511-1291-1-ND, Supplier Part Number 16=SML-211DTT86, Supplier Part Number 18=SML-211DTT86, Supplier Part Number 19=SML-211DTT86, Supplier Part Number 20=1685055, Supplier Part Number 21=1685055, Test Current=2mA, Viewing Angle=140°, Wavelength=630nm, Width=1.25mm
J1: library part CONN-SOCKET-F-10x2-RA, "Female Socket, 10x2, Pitch 2.54mm, 20-Pin, Right-Angle", Colour=Black, Manufacturer=Sullins, Manufacturer Part Number=SFH11-PBPC-D10-RA-BK, Package Quantity=1, Supplier Part Number 1=S9205-ND, ComponentLink1Description=https://datasheet.ciiva.com/16226/sfh11-pbpc-d10-ra-bk-16226946.pdf, ComponentLink1URL=https://datasheet.ciiva.com/16226/sfh11-pbpc-d10-ra-bk-16226946.pdf, ComponentLink2Description=https://datasheet.ciiva.com/754/sfh11-pxxc-dxx-ra-xx11161-c-754566.pdf, ComponentLink2URL=https://datasheet.ciiva.com/754/sfh11-pxxc-dxx-ra-xx11161-c-754566.pdf, Connector Type=Socket,Header, Contact Plating=Gold, Lead Free="Lead Free", Number of Positions=20, Number of Rows=2, Packaging=Tray, Pitch=0.1inch, Pricing 1="1=1.67, 10=1.38, 25=1.2936, 50=1.15, 100=1.035, 250=0.9545, 500=0.8625, 1000=0.7648, 2500=0.7331 (USD)", Pricing 2="1080=0.875 (USD)", Pricing 3="10=1.5, 25=1.42, 75=1.25, 200=1.03, 500=0.875 (USD)", Row Spacing=0.1inch, Stock 1=3527, Stock 2=0, Stock 3=0, Supplier 1=Digikey, Supplier 2="Future Electronics", Supplier 3="Future Electronics", Supplier Part Number 2=SFH11-PBPC-D10-RA-BK, Supplier Part Number 3=2723161, Termination=Solder
J2: library part CONN-HEADER-M-5x2-SHRD, "Male Header, 5x2, Pitch 2.54mm, 10-Pin, Shrouded", Case/Package=100, Colour=Black, Manufacturer="On-Shore Technology", Manufacturer Part Number=302-S101, ComponentLink1Description=https://datasheet.ciiva.com/732/302-sxxx-732946.pdf, ComponentLink1URL=https://datasheet.ciiva.com/732/302-sxxx-732946.pdf, Connector Type="Male Pin", Contact Plating=Gold, Number of Positions=10, Number of Rows=2, Packaging=Tray, Pitch=0.1inch, Pricing 1="1=0.252, 10=0.2343, 50=0.1686, 100=0.1605, 250=0.1426, 500=0.1346, 1000=0.111, 2500=0.1004, 5000=0.0932 (USD)", Pricing 2="1=0.28, 10=0.263, 50=0.1912, 100=0.1838, 250=0.165, 500=0.1575, 1000=0.1313, 2500=0.12, 5000=0.1125 (USD)", Pricing 3="1=0.25 (USD)", Row Spacing=0.1inch, Stock 1=10, Stock 2=46867, Supplier 1=Arrow, Supplier 2=Digikey, Supplier 3="Peerless Electronic Supplies", Supplier Part Number 1=302-S101, Supplier Part Number 2=ED1543-ND, Supplier Part Number 3=302-S101, Termination=Solder
J3: library part CONN-HEADER-M-5x2-50mil-shrd, "Male Header, 5x2, Pitch 1.27mm, 10-Pin, Shrouded", Manufacturer="CNC Tech", Manufacturer Part Number=3220-10-0100-00, Standard Package=3,200, Supplier Part Number 1=1175-1627-ND, Category="Connectors, Interconnects", ComponentLink1Description=https://datasheet.ciiva.com/18655/3220-xx-0100-00-18655342.pdf, ComponentLink1URL=https://datasheet.ciiva.com/18655/3220-xx-0100-00-18655342.pdf, Connector Type="Header, Shrouded", Contact Finish=Gold, Contact Finish Thickness=Flash, Contact Type="Male Pin", Dynamic Catalog="CNC Tech, 0.050\" (1.27mm)", Family="Rectangular Connectors - Headers, Male Pins", Mating="3230-10-0102-00-ND / - IDC SOCKET 0.050 10 POS / 1175-1645-ND / - IDC SOCKET 0.050 10 POS", Mating Products="1175-1645-ND / - IDC SOCKET 0.050 10 POS / 3230-10-0102-00-ND / - IDC SOCKET 0.050 10 POS / 1175-1646-ND / - IDC SOCKET 0.050 10 POS / 3230-10-0104-00-ND / - IDC SOCKET 0.050 10 POS", Minimum Quantity="Male Pin", Mounting Type="Through Hole", Number of Positions=10, Number of Positions Loaded=All, Number of Rows=2, Online Catalog="CNC Tech, 0.050\" (1.27mm)", Other Names="1175-1627 / 3220-10-0100-00-ND", Packaging=Tray, Pitch="0.050\" (1.27mm)", Pricing 1="1=0.48, 10=0.45, 50=0.36, 100=0.345, 250=0.315, 500=0.3, 1000=0.2475, 2500=0.225, 5000=0.2175 (USD)", Pricing 2="6720=0.2045 (USD)", Quantity Available=Tray, Row Spacing="0.050\" (1.27mm)", Stock 1=66468, Stock 2=0, Supplier 1=Digikey, Supplier 2=Digikey, Supplier Part Number 2=3220-10-0100-00-ND, Termination=Solder
Q1 Q3: library part CMP-1259-00111-1, "Dual N-Channel Trench MOSFET, 30 V, 0.35 A, -55 to 150 degC, 6-Pin SOT363, Tape and Reel", Manufacturer="NXP Semiconductors", Automotive Qualified=Y, Channel Type=N, Code_JEITA=SC-88, ComponentLink1Description="Manufacturer URL", ComponentLink1URL=http://www.nxp.com/, ComponentLink2Description=Datasheet, ComponentLink2URL=http://www.nxp.com/documents/data_sheet/NX3008NBKS.pdf, ComponentLink3Description="Package Specification", ComponentLink3URL=http://www.nxp.com/documents/outline_drawing/sot363_po.pdf, DatasheetVersion="Rev. 1", ID [max] (A)=0.35, IDM [max] (A)=1.4, Mounting Technology="Surface Mount", PackageDescription="6-Pin Small Outline Transistor Package, Body 2 x 1.25 mm, Pitch 0.65 mm", PackageReference=SOT363, PackageVersion="06-03-16, 03/2006", Packing="Tape & Reel", PartId=1, PartNumber=NX3008NBKS,115, VDS [max] (V)=30, VGSth [typ] (V)=0.9
Q2: library part CMP-1259-00112-1, "Dual P-Channel Trench MOSFET, -30 V, -0.2 A, -55 to 150 degC, 6-Pin SOT363, Tape and Reel", Manufacturer="NXP Semiconductors", Automotive Qualified=Y, Channel Type=P, Code_JEITA=SC-88, ComponentLink1Description="Manufacturer URL", ComponentLink1URL=http://www.nxp.com/, ComponentLink2Description=Datasheet, ComponentLink2URL=http://www.nxp.com/documents/data_sheet/NX3008PBKS.pdf, ComponentLink3Description="Package Specification", ComponentLink3URL=http://www.nxp.com/documents/outline_drawing/sot363_po.pdf, DatasheetVersion="Rev. 1", ID [max] (A)=-0.2, IDM [max] (A)=-0.8, Mounting Technology="Surface Mount", PackageDescription="6-Pin Small Outline Transistor Package, Body 2 x 1.25 mm, Pitch 0.65 mm", PackageReference=SOT363, PackageVersion="06-03-16, 03/2006", Packing="Tape & Reel", PartId=1, PartNumber=NX3008PBKS,115, VDS [max] (V)=-30, VGSth [typ] (V)=-0.9
R1: library part RES_ARRAY_0603_8x_10Ohm, "10 Ohm ±5% 62.5mW Power Per Element Isolated Resistor Network/Array", Case/Package=Molded, Manufacturer=CTS, Manufacturer Part Number=742C163100JP, Max Operating Temperature=125°C, Min Operating Temperature=-55°C, Number of Resistors=8, Package Quantity=4000, Power Dissipation=63mW, Power Per Element=62.5mW, Supplier Part Number 1=742C163100JPTR-ND, Supplier Part Number 10=742C163100JPTR, Supplier Part Number 11=742C163100JPTR**MULT1, Temperature Coefficient=200ppm/°C, Tolerance=5%, Working Voltage=50V, Circuit Type=Isolated, ComponentLink1Description=https://datasheet.ciiva.com/16402/008-0335-0-16402366.pdf, ComponentLink1URL=https://datasheet.ciiva.com/16402/008-0335-0-16402366.pdf, ComponentLink2Description=https://datasheet.ciiva.com/2708/008-0335-0-2708080.pdf, ComponentLink2URL=https://datasheet.ciiva.com/2708/008-0335-0-2708080.pdf, ComponentLink3Description=https://datasheet.ciiva.com/26820/getdatasheetpartid-91932-26820412.pdf, ComponentLink3URL=https://datasheet.ciiva.com/26820/getdatasheetpartid-91932-26820412.pdf, Composition="Thick Film", Contact Plating=Tin, Depth=1.6mm, Height=0.028inch, Lead Free="Lead Free", Length=6.4mm, Military Standard=Not, Mount="Surface Mount", Number of Elements=8, Number of Pins=16, Number of Terminals=16, Packaging="Tape and Reel", Pricing 1="4000=0.0693, 8000=0.0624, 12000=0.061, 28000=0.0589, 100000=0.0572 (USD)", Pricing 2="1=0.46, 10=0.351, 25=0.2668, 50=0.1982, 100=0.1474, 250=0.1245, 500=0.1067, 1000=0.0813 (USD)", Pricing 3="1=0.47, 10=0.361, 50=0.361, 100=0.11, 1000=0.084, 10000=0.063 (USD)", Pricing 4="4000=0.1865, 8000=0.1661, 12000=0.1616, 28000=0.156 (USD)", Pricing 5="4000=0.112, 8000=0.064 (USD)", Pricing 6="1=0.46, 10=0.351, 25=0.2668, 50=0.1982, 100=0.1474, 250=0.1245, 500=0.1067, 1000=0.0813 (USD)", Pricing 7="4000=0.0674, 8000=0.0565, 16000=0.0537, 24000=0.0511, 40000=0.0499 (USD)", Pricing 9="4000=0.112, 8000=0.064 (USD)", Pricing 10="501=0.1292 (USD)", Pricing 11="1=0.2879, 10=0.2314, 25=0.2171, 100=0.1566, 250=0.1464, 500=0.13 (USD)", Pricing 12="10=1, 100=0.17, 500=0.1 (USD)", Radiation Hardening=No, Resistance=10R, Stock 1=8000, Stock 2=8575, Stock 3=3120, Stock 4=796, Stock 5=0, Stock 6=8575, Stock 7=0, Stock 8=0, Stock 9=0, Stock 10=2003, Stock 11=2003, Stock 12=5873, Supplier 1=Digikey, Supplier 2=Digikey, Supplier 3=Mouser, Supplier 4=Arrow, Supplier 5="Future Electronics", Supplier 6=Digikey, Supplier 7=Avnet, Supplier 8=Digikey, Supplier 9="Future Electronics", Supplier 10=Verical, Supplier 11=Arrow, Supplier 12=Arrow, Supplier Part Number 2=742C163100JPDKR-ND, Supplier Part Number 3=774-742C163100JP, Supplier Part Number 4=742C163100JP, Supplier Part Number 5=4272464, Supplier Part Number 6=742C163100JPCT-ND, Supplier Part Number 7=742C163100JP, Supplier Part Number 8=742C163100JP-ND, Supplier Part Number 9=742C163100JP, Supplier Part Number 12=742C163100JPTR, Terminal Pitch=0.8mm, Termination=Concave, Width=0.063inch
TP1: library part KEYS-TESTPOINT-5001, "PC Test Point Miniature, Through Hole", Color=Black, Manufacturer="Keystone Electronics Corp.", Supplier Part Number 1=534-5001, ComponentLink1Description=Datasheet, ComponentLink1URL=http://www.keyelco.com/product-pdf.cfm?p=1309, Man. Product No.=5001, Supplier 1=Mouser, Supplier 2=Farnell, Supplier 3=Digi-Key, Supplier 4=Farnell, Supplier 5=Newark, Supplier 6=Newark, Supplier Part Number 2=1463077, Supplier Part Number 3=36-5001-ND, Supplier Part Number 4=2301278, Supplier Part Number 5=52F7278, Supplier Part Number 6=62W5135
TP2: library part KEYS-TESTPOINT-5000, "PC Test Point Miniature, Through Hole", Color=Red, Manufacturer="Keystone Electronics Corp.", Supplier Part Number 1=36-5000-ND, ComponentLink1Description=Datasheet, ComponentLink1URL=http://www.keyelco.com/product-pdf.cfm?p=1309, Man. Product No.=5000, Supplier 1=Digi-Key, Supplier 2=Farnell, Supplier 3=Mouser, Supplier 4=Farnell, Supplier 5=Newark, Supplier 6=Newark, Supplier Part Number 2=1463076, Supplier Part Number 3=534-5000, Supplier Part Number 4=2250281, Supplier Part Number 5=07J9695, Supplier Part Number 6=52F7277
TP3: library part KEYS-TESTPOINT-5002, "PC Test Point Miniature, Through Hole", Color=White, Manufacturer="Keystone Electronics Corp.", Supplier Part Number 1=62W5136, ComponentLink1Description=Datasheet, ComponentLink1URL=http://www.keyelco.com/product-pdf.cfm?p=1309, Man. Product No.=5002, Supplier 1=Newark, Supplier 2=Digi-Key, Supplier 3=Farnell, Supplier 4=Newark, Supplier Part Number 2=36-5002-ND, Supplier Part Number 3=2301279, Supplier Part Number 4=52F7279
TP4: library part KEYS-TESTPOINT-5116, "PC Test Point Miniature, Through Hole", Color=Green, Manufacturer="Keystone Electronics Corp.", Supplier Part Number 1=95M2478, ComponentLink1Description=Datasheet, ComponentLink1URL=http://keyelco.com/userAssets/file/M65p56.pdf, Man. Product No.=5116, Supplier 1=Newark, Supplier 2=Digi-Key, Supplier 3=Farnell, Supplier 4=Mouser, Supplier Part Number 2=36-5116-ND, Supplier Part Number 3=2501301, Supplier Part Number 4=534-5116
TP5: library part KEYS-TESTPOINT-5004, "PC Test Point Miniature, Through Hole", Color=Yellow, Manufacturer="Keystone Electronics Corp.", Supplier Part Number 1=2301281, ComponentLink1Description=Datasheet, ComponentLink1URL=http://www.keyelco.com/product-pdf.cfm?p=1309, Man. Product No.=5004, Supplier 1=Farnell, Supplier 2=Newark, Supplier 3=Allied, Supplier 4=Digi-Key, Supplier 5=Allied, Supplier 6=Farnell, Supplier 7=Mouser, Supplier 8=Newark, Supplier Part Number 2=52F7281, Supplier Part Number 3=70182994, Supplier Part Number 4=36-5004-ND, Supplier Part Number 5=70799415, Supplier Part Number 6=1533290, Supplier Part Number 7=534-5004, Supplier Part Number 8=62W5138
TP6: library part KEYS-TESTPOINT-5003, "PC Test Point Miniature, Through Hole", Color=Orange, Manufacturer="Keystone Electronics Corp.", Supplier Part Number 1=62W5137, ComponentLink1Description=Datasheet, ComponentLink1URL=http://www.keyelco.com/product-pdf.cfm?p=1309, Man. Product No.=5003, Supplier 1=Newark, Supplier 2=Digi-Key, Supplier 3=Allied, Supplier 4=Allied, Supplier 5=Newark, Supplier Part Number 2=36-5003-ND, Supplier Part Number 3=70182828, Supplier Part Number 4=70799414, Supplier Part Number 5=52F7280
TP7: library part KEYS-TESTPOINT-5119, "PC Test Point Miniature, Through Hole", Color=Purple, Manufacturer="Keystone Electronics Corp.", Supplier Part Number 1=36-5119-ND, ComponentLink1Description=Datasheet, ComponentLink1URL=http://keyelco.com/userAssets/file/M65p56.pdf, Man. Product No.=5119, Supplier 1=Digi-Key, Supplier 2=Newark, Supplier 3=Allied, Supplier Part Number 2=95M2481, Supplier Part Number 3=70182273
TP8: library part KEYS-TESTPOINT-5118, "PC Test Point Miniature, Through Hole", Color=Grey, Manufacturer="Keystone Electronics Corp.", Supplier Part Number 1=95M2480, ComponentLink1Description=Datasheet, ComponentLink1URL=http://keyelco.com/userAssets/file/M65p56.pdf, Man. Product No.=5118, Supplier 1=Newark, Supplier 2=Allied, Supplier 3=Digi-Key, Supplier Part Number 2=70182272, Supplier Part Number 3=36-5118-ND

## Via types
v1: diameter 0.45, hole 0.2, Component Side to Bottom Layer, tented both sides, 23 vias

## Nets (pads, with @x,y where several pads share a name; then routed paths per layer and width w, separated by ;. In a path a pad name is that pad's centre, name@x,y a point inside that pad or via, vN(x,y) a via of type N, cw(c..) or ccw(c..) an arc to the next point about the centre after c; other vN are vias at no path point)
GND: J1.4 J1.6 J1.8 J1.10 J1.12 J1.14 J1.16 J1.18 J1.20 J2.3 J2.5 J2.9 J3.3 J3.5 J3.9 Q1.1 Q1.4 Q3.1 Q3.4 R1.5 R1.6 R1.7 TP1.1 | length 5.8
  Component Side w0.2: v1(36.05,35.85) 36.05,36.35 v1(36.9,37.2) 36.9,37.236 38.2,38.536 v1@38.2,39.3
  Bottom Layer w0.2: Q3.4 36.85,37.725 36.85,37.25 v1(36.9,37.2) ; Q1.1 38,39.6 v1(38.3,39.3)
NetD1_2: D1.2 R1.16 | length 17.6
  Component Side w0.2: v1(32.5,26) 32.5,26.716 D1.2
  Bottom Layer w0.2: v1(32.5,26) 30.6,27.9 30.6,37.8 33.4,40.6 R1.16
NetD2_2: D2.2 R1.15 | length 18.3
  Component Side w0.2: v1(35.3,26) 35.3,26.722 D2.2
  Bottom Layer w0.2: R1.15 33.4,39.8 31,37.4 31,33.1 32.2,31.9 33.3,31.9 34,31.2 34,27.3 v1(35.3,26)
NetD3_2: D3.2 R1.14 | length 19.5
  Component Side w0.2: v1(38.108,26.008) D3.2
  Bottom Layer w0.2: R1.14 33.4,39 31.4,37 31.4,33.35 32.45,32.3 35.6,32.3 36.8,31.1 36.8,27.316 v1(38.108,26.008)
NetD4_2: D4.2 R1.13 | length 20.8
  Component Side w0.2: v1(40.9,26) 40.9,26.734 D4.2
  Bottom Layer w0.2: R1.13 33.4,38.2 31.8,36.6 31.8,33.6 32.7,32.7 38.1,32.7 39.5,31.3 39.5,27.4 v1(40.9,26)
NetD5_1: D5.1 Q2.1 | length 17.5
  Component Side w0.2: v1(43.2,37.1) 43.2,35.7 47.6,31.3 47.6,30.3 47,29.7 44.694,29.7 D5.1
  Bottom Layer w0.2: Q2.1 39.85,36.407 40.557,35.7 41.8,35.7 v1(43.2,37.1)
NetD5_2: D5.2 R1.12 | length 22.4
  Component Side w0.2: D5.2 43.696,26.004 v1(43.7,26)
  Bottom Layer w0.2: R1.12 33.4,37.4 32.2,36.2 32.2,33.9 33,33.1 40.9,33.1 42.3,31.7 42.3,27.4 v1(43.7,26)
NetD6_1: D6.1 Q2.4 | length 12.1
  Component Side w0.2: v1(45.5,34.1) 45.6,34.1 48,31.7 48,30 46.636,28.636 D6.1
  Bottom Layer w0.2: Q2.4 41.525,34.9 42.4,34.9 43.075,34.225 45.375,34.225 v1(45.5,34.1)
NetD6_2: D6.2 R1.11 | length 23.2
  Component Side w0.2: D6.2 46.49,26.01 v1(46.5,26)
  Bottom Layer w0.2: R1.11 33.4,36.6 32.6,35.8 32.6,34.1 33.2,33.5 42.6,33.5 45.1,31 45.1,27.4 v1(46.5,26)
NetD7_2: D7.2 R1.10 | length 20.8
  Component Side w0.2: v1(48.5,29.8) 48.53,29.83 D7.2
  Bottom Layer w0.2: R1.10 33.4,35.8 33,35.4 33,34.3 33.4,33.9 42.9,33.9 44.5,32.3 47,32.3 48.5,30.8 v1(48.5,29.8)
NetQ1_3: Q1.3 R1.2 | length 1.4
  Bottom Layer w0.2: R1.2 36.675,39.8 Q1.3
NetQ1_6: Q1.6 R1.1 | length 2.9
  Bottom Layer w0.2: 35.8,40.6 37.343,40.6 38,41.257 Q1.6
NetQ3_3: Q3.3 R1.4 | length 2.9
  Bottom Layer w0.2: R1.4 35.6,38.2 36.45,37.35 36.45,36.175 Q3.3
NetQ3_6: Q3.6 R1.3 | length 2.6
  Bottom Layer w0.2: 35.8,39 36.018,39 36.418,38.6 37.343,38.6 37.9,38.043 Q3.6
PULP_R\S\T\: J1.15 J2.7 J3.7 Q2.5 TP8.1 | length 42.4
  Component Side w0.2: v1(40.5,35) 42.224,35 TP8.1
  Component Side w0.4: J1.15 29.51,35.31 32.05,37.85 32.05,40.45 34.78,43.18 J2.7 39.88,43.18 41.2,44.5 47.485,44.5 J3.7
  Bottom Layer w0.2: J2.7 40.6,42.065 40.6,38.7 39.3,37.4 39.3,36.2 v1(40.5,35) Q2.5
  Bottom Layer w0.4: J3.7@47.485,44.5 J3.7
T\R\S\T\: J1.3 J2.10 J3.10 Q2.2 TP7.1 | length 41.9
  Component Side w0.15: v1(40.5,36.9) 42.025,38.425 J2.10
  Component Side w0.2: v1(40.5,36.9) 40.05,36.45 40.05,34.65 43.696,31.004 TP7.1
  Bottom Layer w0.2: Q2.2 v1(40.5,36.9)
  Bottom Layer w0.4: J1.3 35.07,49.53 37.6,47 40.2,47 40.7,46.5 40.7,44.9 41.1,44.5 42.9,44.5 43.8,43.6 43.8,42.415 J2.10 46.255,40.64 J3.10
TCK: J1.9 J2.4 J3.4 Q1.2 TP3.1 | length 47.5
  Component Side w0.2: TP3.1 32.52,34.42 v1(37.35,39.25) 37.35,39.65 36.4,40.6 35.4,40.6 v1(34.4,41.6)
  Component Side w0.4: J1.9 34.59,46.99 40.755,46.99 J2.4 ; v1(48.375,50.8) 49.675,49.5 49.675,47.87 J3.4
  Bottom Layer w0.2: J1.9 29.82,41.6 v1(34.4,41.6) ; v1(37.35,39.25) Q1.2
  Bottom Layer w0.4: J2.4 44.565,50.8 v1(48.375,50.8)
TDI: J1.5 J2.8 J3.8 Q1.5 TP4.1 | length 44.5
  Component Side w0.2: TP4.1 35.314,36.25 37.8,38.736 37.8,39.1 37.8,40.9 ; v1(36.1,41.4) 37.3,41.4 37.8,40.9 ; J2.8 40.745,41.9 38.8,41.9 37.8,40.9
  Component Side w0.4: J2.8 45.42,43.18 46.3,42.3 49.3,42.3 49.8,42.8 49.8,43.6 48.945,44.455 J3.8
  Bottom Layer w0.2: v1(36.1,41.4) 36.3,41.2 36.9,41.2 37.35,41.65 Q1.5
  Bottom Layer w0.4: J1.5 35.51,46.99 38.1,44.4 39.9,44.4 41.12,43.18 J2.8
TDO: J1.13 J2.6 J3.6 Q3.2 TP5.1 | length 56
  Component Side w0.2: J1.13 28.3,35.62 28.3,31.3 29.1,30.5 30.2,30.5 31.274,29.426 36.8,29.426 TP5.1 38.108,34.792 v1(37.9,35)
  Component Side w0.4: J1.13 31,38.32 31,41 34.45,44.45 40.05,44.45 41.32,45.72 J2.6 ; J3.6 50.3,47.225 50.3,49.7 v1(49.2,50.8)
  Bottom Layer w0.2: Q3.2 37.25,35.65 v1(37.9,35)
  Bottom Layer w0.4: J2.6 46.455,50.15 48.55,50.15 v1(49.2,50.8)
TMS: J1.7 J2.2 J3.2 Q3.5 TP6.1 | length 49.1
  Component Side w0.2: v1(37.6,37.3) 37.6,36.3 39.3,34.6 39.3,32.336 TP6.1
  Component Side w0.4: J1.7 37.26,52.2 40.625,52.2 J2.2 46.265,50.8 J3.2
  Bottom Layer w0.2: J1.7 36.825,44.45 38.5,42.775 38.5,40 38.8,39.7 38.8,37.8 38.3,37.3 v1(37.6,37.3) 37.25,37.65 Q3.5
VREF: D1.1 D2.1 D3.1 D4.1 D7.1 J1.1 J2.1 J3.1 Q2.3 Q2.6 TP2.1 | length 12.1
  Bottom Layer w0.2: v1(38.7,34.525) Q2.6
  Bottom Layer w0.4: J1.1 38.215,52.07 J2.1 ; Q2.3 v1(41.575,36.475)
pads on no net: J1.2 J1.11 J1.17 J1.19 R1.8 R1.9

## Polygon pours and split planes (outlines as drawn)
GND on Bottom Layer "GND_L02_P000" (solid, pour order 0): 25.4,55.88 50.8,55.88 50.8,25.4 25.4,25.4
VREF on Component Side "VREF_L01_P002" (solid, pour order 2): 25.4,55.88 50.8,55.88 50.8,25.4 25.4,25.4

## Silkscreen, mask and mechanical layers (free items; w line width, h text height)
Top Overlay:
  lines w0.1: 48.75,26.519 50.02,26.519 ; 49.004,26.265 49.766,26.265 ; 49.258,26.011 49.512,26.011 ; 49.385,26.519 49.385,26.9
  text "JTAG ARM/TI to PULP / Converter Board 1.1" at 34.7,35.9 h1 r90
  text "CK" at 33.282,32.512 h1.52 r90
  text "DI" at 36.076,32.512 h1.52 r90
  text "DO" at 38.87,32.512 h1.52 r90
  text "MS" at 41.664,32.512 h1.52 r90
  text "RS" at 44.458,32.512 h1.52 r90
  text "PR" at 47.252,32.512 h1.52 r90
Bottom Overlay:
  text "by smach" at 47.4,27.7 h1.2

## Text inside footprints (layer, text, board x,y; h text height)
J1: Mechanical 11 "Board Outline" at 23.338,49.733 h1.52 r270